# Altium PCB УШЯИ 758724.375.PcbDoc
Units mm, origin at the board's own origin, x right, y up, seen from the top; angles counter-clockwise.
Board outline 78 x 122 mm, 2 copper layers (Top Layer, Bottom Layer), stack 1.5 mm thick; 11 components, 5 nets, 41 pads, 32 vias.
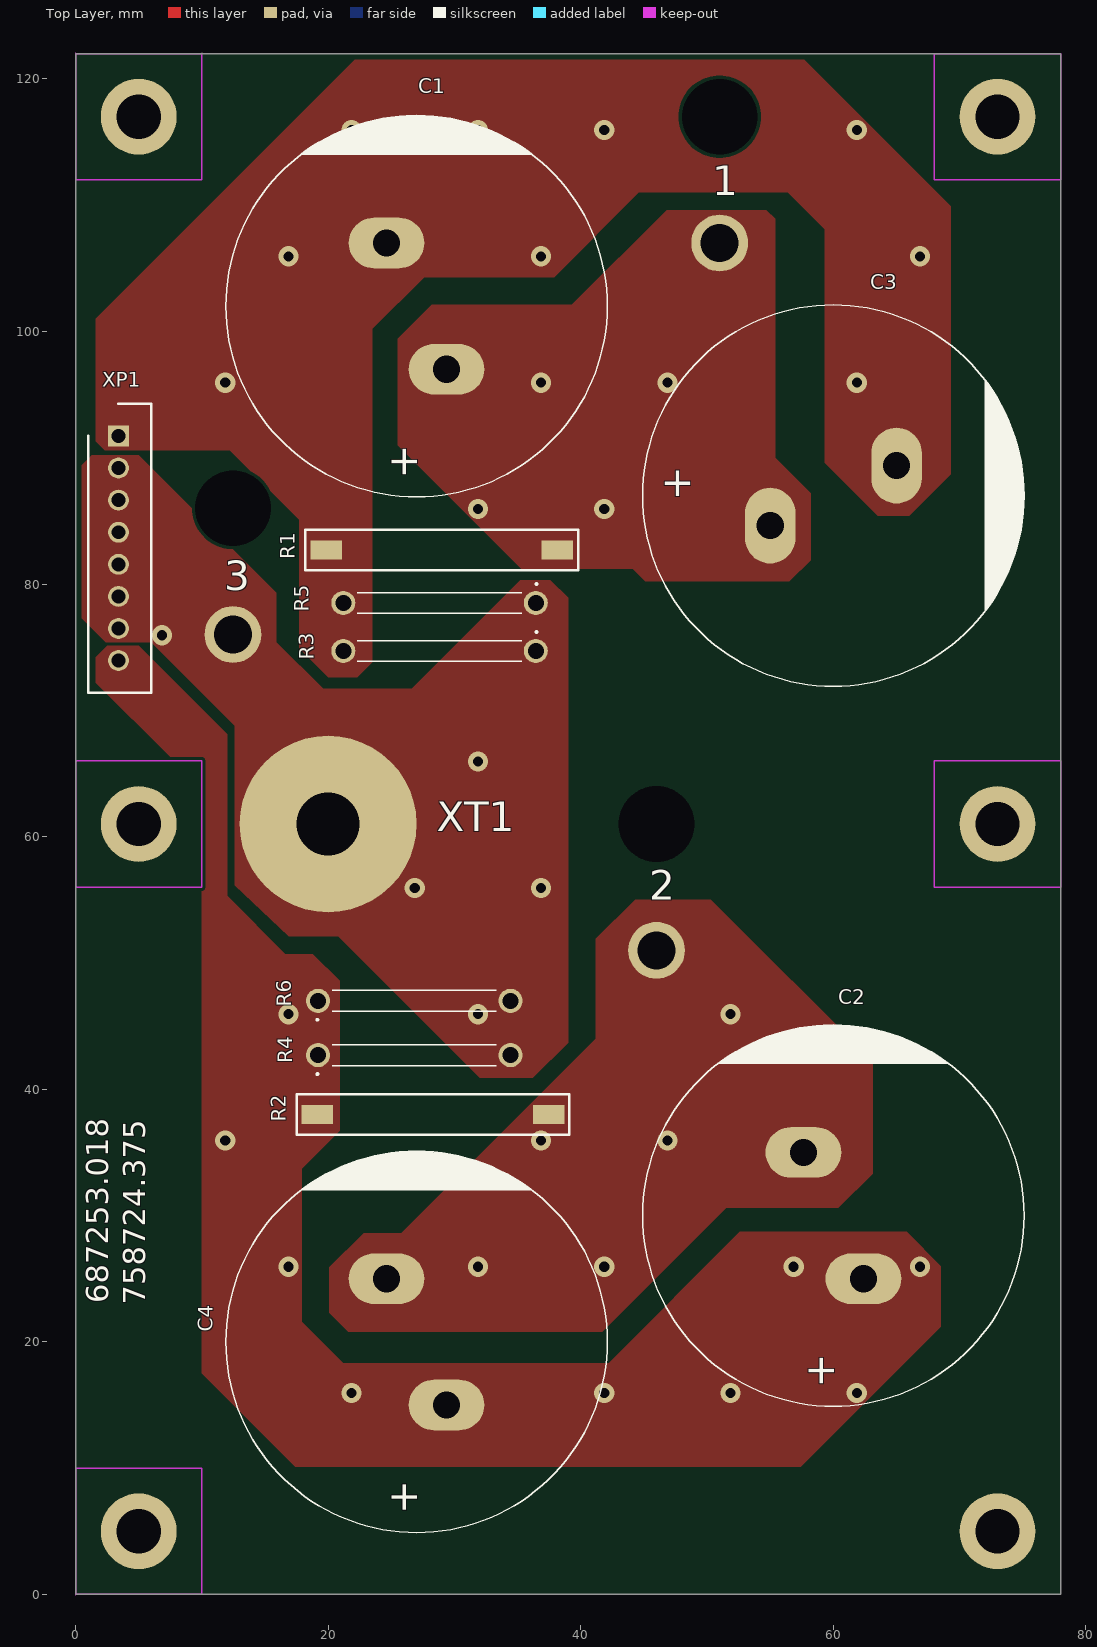
[diagram p0: Top Layer view]
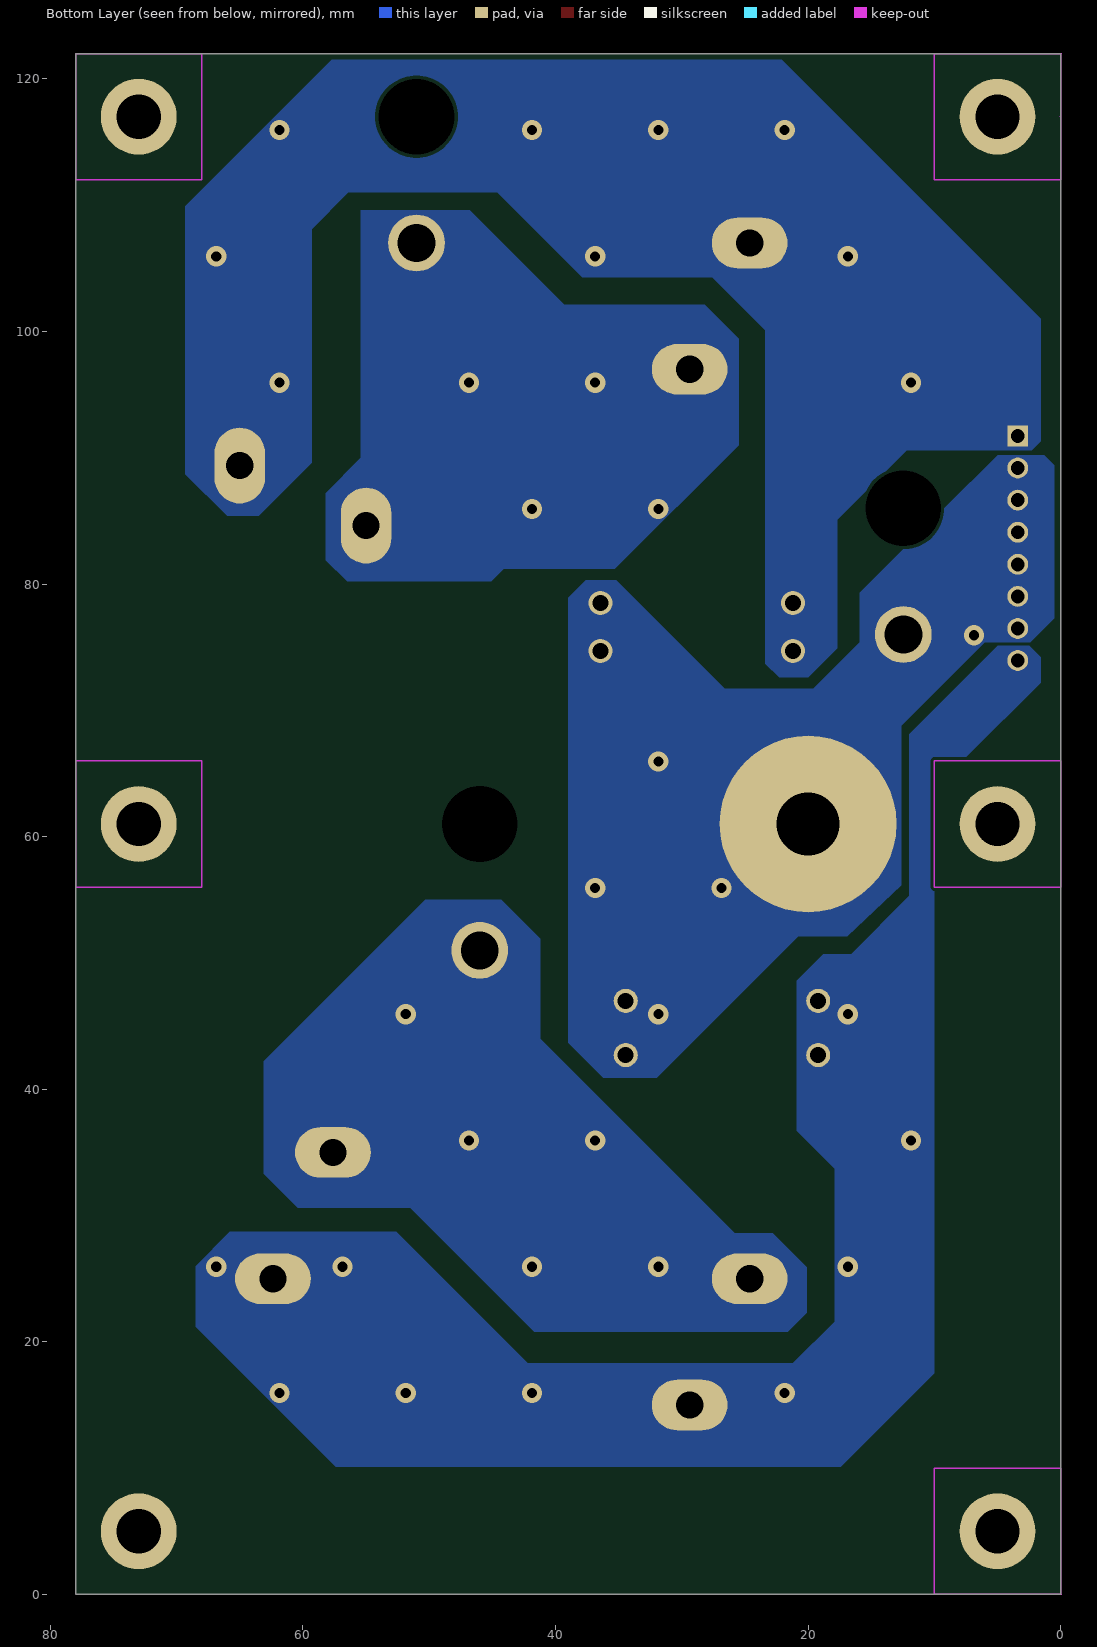
[diagram p1: Bottom Layer view, seen from below]
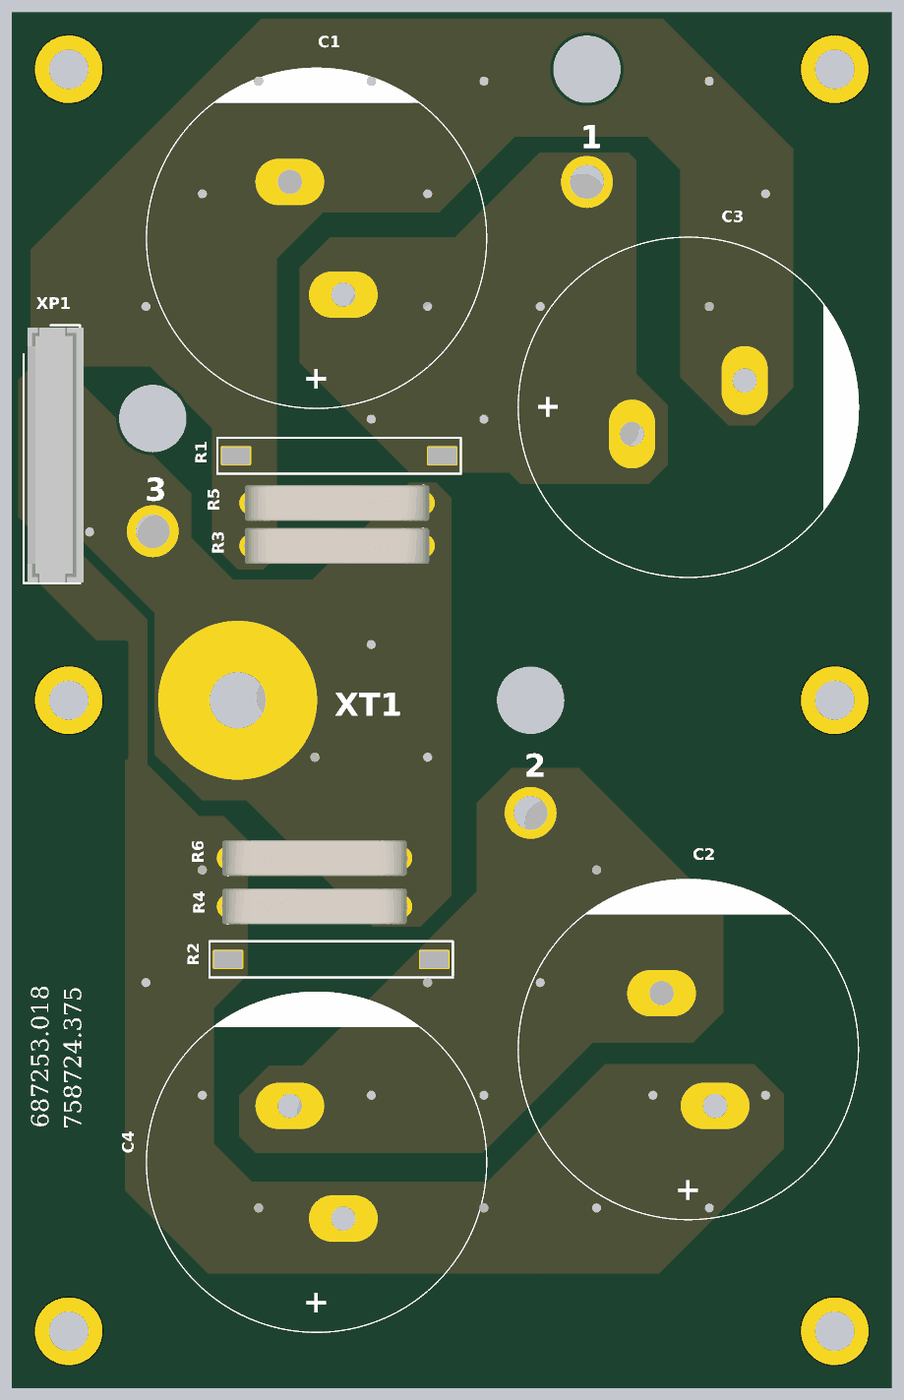
[diagram p2: 3D render of the assembled board from above, using the file's embedded part models]

## Layer stack, top to bottom
Top Solder: solder mask 0.025, Solder Resist, Dk 3.5
Top Layer: signal copper 0.105
Dielectric 1: dielectric 1.29, FR-4, Dk 4.8
Bottom Layer: signal copper 0.105
Bottom Solder: solder mask 0.025, Solder Resist, Dk 3.5

## Board outline
0,0 0,122 78,122 78,0

## Design rules (kind name [scope] priority, off if disabled: settings)
Clearance [All] p1: gap=0.254 ignorepadtopadclearanceinfootprint=FALSE
Height [All] p1: minheight=0 maxheight=100 prefheight=12.7
HoleSize [All] p1: absolutevalues=TRUE maxlimit=20 minlimit=0.025 maxpercent=80.000 minpercent=20.000
MinimumSolderMaskSliver [All] p1: minsoldermaskwidth=0.1
PolygonConnect [All] p1: connectstyle=Direct reliefconductorwidth=0.254 reliefentries=4 polygonreliefangle="90 Angle" airgapwidth=0.254
RoutingVias [All] p1: holewidth=0.3 width=0.6 viastyle="Through Hole" minholewidth=0.3 minwidth=0.6 maxholewidth=1 maxwidth=2
SilkToSilkClearance [All] p1: silktosilkclearance=0.1
SilkToSolderMaskClearance [IsPad] p1: minsilkscreentomaskgap=0.1 clearancetoexposedcopper=TRUE
SolderMaskExpansion [All] p1: expansion=0.102 istentingtop=FALSE
Width [All] p1: maxlimit=0.254 minlimit=0.254 preferedwidth=0.254
25 further rules are at their usual default settings.

## Components (designator, comment, footprint, x,y, rotation, side; value= is the part's Value field where it differs from the comment)
C1 "B43640A2228M000" B43640A2228M000 27,102 r90 top
C2 "B43640A2228M000" B43640A2228M000 60,30 r90 top
C3 "B43640A2228M000" B43640A2228M000 60,87 r0 top
C4 "B43640A2228M000" B43640A2228M000 27,20 r90 top
R1 "С2-33Н-0,5-24 кОм +-5%" "С2-33Н-0,5АИ (070.04.0601.14.00)" 29,82.7 r0 top value="430 Ом"
R2 "С2-33Н-0,5-24 кОм +-5%" "С2-33Н-0,5АИ (070.04.0601.14.00)" 28.3,38 r180 top value="430 Ом"
R3 "OAR3-R005FI" OAR3 36.44,74.7 r180 top value="0.005 Ом"
R4 "OAR3-R005FI" OAR3 19.2,42.7 r0 top value="0.005 Ом"
R5 "OAR3-R005FI" OAR3 36.44,78.5 r180 top value="0.005 Ом"
R6 "OAR3-R005FI" OAR3 19.2,47 r0 top value="0.005 Ом"
XP1 "280373-2" 280373-2 3.4,91.72 r270 top

## Footprints (in the part's own frame and the unit in brackets; to place one, negate y for a bottom-side part, rotate by r counter-clockwise, add the part's x,y. Pads: shape width x height; smd on the part's side, far side on the other; paste and mask are expansions set on the pad)
280373-2 [mm] "AMPMODU 2"
  rect 1.65x1.65 hole 1.1: 1(0,0)
  round 1.65 hole 1.1: 2(2.54,0) 3(5.08,0) 4(7.62,0) 5(10.16,0) 6(12.7,0) 7(15.24,0) 8(17.78,0)
  silkscreen extent -2.56,-2.4 20.34,2.6, body extent -2.35,-2.06 20.25,2.94, height 12.6
B43640A2228M000 [mm]
  oval 4x6 hole 2.15 mask+0.05: 1(-5,-2.375) 2(5,2.375)
  silkscreen extent -15.1,-15.1 15.1,15.1, body extent -15,-15 15,15, height 55
OAR3 [mm]
  round 1.906 hole 1.271: 1(0,0) 2(15.24,0)
  silkscreen extent -0.1,-1.55 14.12,0.82, body extent -0.57,-1.59 15.81,1.59, height 17.89
"С2-33Н-0,5АИ (070.04.0601.14.00)" [mm] "Резисторы постоянные непроволочные общего применения С2-33Н АИ, производитель \"АО\"НПО\"ЭРКОН\""
  rect 2.5x1.5 smd: 1(-9.15,0) 2(9.15,0)
  silkscreen extent -10.8,-1.6 10.8,1.6, body extent -10.25,-1.6 10.25,1.6, height 3.2

## Part data
C1 C2 C3 C4: "Capacitor Polarised, 2200uF, 30x55"
R1 R2: "Резисторы постоянные непроволочные общего применения С2-33Н АИ, производитель \"АО\"НПО\"ЭРКОН\"", Диапазон значений номинальных сопротивлений="от 1 Ом до 5,11 МОм", Категории качества=«ОТК», Номинальная мощность рассеяния="0,5 Вт", Ряд сопротивлений="Е24, Е96", ТУ="ОЖО.467.173 ТУ"
XP1: "Connector"
R3 R4 R5 R6: ModelPrint=0402

## Free pads (board coordinates)
  round 6 hole 3.5 unplated: 1(5,5) 1(5,61) 1(5,117) 1(73,61) 1(73,117) 1(73,5)
  round 4.5 hole 3 mask+0.05: 1(51,107) 2(46,51) 3(12.463,76.003)
  round 14 hole 5 mask+0.05: 4(20,61)
  round 0 hole 6 unplated mask+0.05: TH5(12.463,86.003) TH5(46,61) TH5(51,117)

## Via types
v1: diameter 1.6, hole 0.8, Top Layer to Bottom Layer, tented both sides, 32 vias

## Nets (pads, with @x,y where several pads share a name; then routed paths per layer and width w, separated by ;. In a path a pad name is that pad's centre, name@x,y a point inside that pad or via, vN(x,y) a via of type N, cw(c..) or ccw(c..) an arc to the next point about the centre after c; other vN are vias at no path point)
Net1: C1.1 C3.1 pad.1@51,107 R1.2
  other v1: 31.857,85.943 41.857,85.943 36.857,95.943 46.857,95.943
Net2: C2.2 C4.2 pad.2 R2.1
  other v1: 31.857,25.943 41.857,25.943 36.857,35.943 46.857,35.943 51.857,45.943
Net3: pad.3 pad.4 R3.1 R4.2 R5.1 R6.2 XP1.2 XP1.3 XP1.4 XP1.5 XP1.6 XP1.7
  other v1: 31.857,45.943 26.857,55.943 36.857,55.943 31.857,65.943 6.857,75.943
NetC1_2: C1.2 C3.2 R1.1 R3.2 R5.2 XP1.1
  other v1: 11.857,95.943 61.857,95.943 16.857,105.943 36.857,105.943 66.857,105.943 21.857,115.943 31.857,115.943 41.857,115.943 61.857,115.943
NetC2_1: C2.1 C4.1 R2.2 R4.1 R6.1 XP1.8
  other v1: 21.857,15.943 41.857,15.943 51.857,15.943 61.857,15.943 16.857,25.943 56.857,25.943 66.857,25.943 11.857,35.943 16.857,45.943

## Polygon pours and split planes (outlines as drawn)
NetC2_1 on Top Layer "NONET_L01_P-001" (solid, pour order 8): 65.8,28.7 68.5,26 68.5,21.2 57.4,10.1 17.4,10.1 10,17.5 10,66.3 7.5,66.3 1.6,72.2 1.6,74.2 2.5,75.1 5,75.1 12,68.1 12,55.3 16.6,50.7 18.8,50.7 20.9,48.6 20.9,36.7 17.9,33.7 17.9,21.6 21.2,18.3 42.2,18.3 52.6,28.7
NetC1_2 on Top Layer "NONET_L01_P-001" (solid, pour order 7): 20,72.6 17.7,74.9 17.7,85.1 12.2,90.6 2.3,90.6 1.6,91.3 1.6,101 22.1,121.5 57.7,121.5 69.3,109.9 69.3,88.7 66,85.4 63.5,85.4 59.3,89.6 59.3,108.1 56.4,111 44.6,111 37.9,104.3 27.6,104.3 23.5,100.2 23.5,73.8 22.3,72.6
Net3 on Top Layer "NONET_L01_P-001" (solid, pour order 10): 16.9,52.1 20.8,52.1 31.995,40.9 36.2,40.9 39,43.7 39,78.9 37.6,80.3 35.2,80.3 26.6,71.7 19.6,71.7 15.9,75.4 15.9,79.3 5,90.2 1.3,90.2 0.5,89.4 0.5,77.3 2.4,75.4 6,75.4 12.616,68.784 12.616,56.17
Net2 on Top Layer "NONET_L01_P-001" (solid, pour order 9): 20.1,22.3 21.6,20.8 41.7,20.8 51.5,30.6 60.4,30.6 63.1,33.3 63.1,42.2 50.3,55 44.3,55 41.2,51.9 41.2,44 25.8,28.6 24.4,28.6 22.8,28.6 20.1,25.9 20.1,25.1
Net1 on Top Layer "NONET_L01_P-001" (solid, pour order 6): 54.7,109.6 46.8,109.6 39.3,102.1 28.2,102.1 25.5,99.4 25.5,91 35.3,81.2 44.1,81.2 45.1,80.2 56.5,80.2 58.2,81.9 58.2,87.2 55.4,90 55.4,101.4 55.4,108.9
Net1 on Bottom Layer "NONET_L01_P-001" (solid, pour order 11): 55.4,109.6 46.8,109.6 39.3,102.1 28.2,102.1 25.5,99.4 25.5,91 35.3,81.2 44.1,81.2 45.1,80.2 56.5,80.2 58.2,81.9 58.2,87.2 55.4,90 55.4,101.4
NetC1_2 on Bottom Layer "NONET_L01_P-001" (solid, pour order 12): 20,72.6 17.7,74.9 17.7,85.1 12.2,90.6 2.3,90.6 1.6,91.3 1.6,101 22.1,121.5 57.7,121.5 69.3,109.9 69.3,88.7 66,85.4 63.5,85.4 59.3,89.6 59.3,108.1 56.4,111 44.6,111 37.9,104.3 27.6,104.3 23.4,100.1 23.4,73.7 22.3,72.6
NetC2_1 on Bottom Layer "NONET_L01_P-001" (solid, pour order 2): 65.8,28.7 68.5,26 68.5,21.2 57.4,10.1 17.4,10.1 10,17.5 10,66.3 7.5,66.3 1.6,72.2 1.6,74.2 2.5,75.1 5,75.1 12,68.1 12,55.3 16.6,50.7 18.8,50.7 20.9,48.6 20.9,36.7 17.9,33.7 17.9,21.6 21.2,18.3 42.2,18.3 52.6,28.7
Net2 on Bottom Layer "NONET_L01_P-001" (solid, pour order 3): 20.1,22.3 21.6,20.8 41.7,20.8 51.5,30.6 60.4,30.6 63.1,33.3 63.1,42.2 50.3,55 44.3,55 41.2,51.9 41.2,44 25.8,28.6 24.4,28.6 22.8,28.6 20.1,25.9 20.1,25.1
Net3 on Bottom Layer "NONET_L01_P-001" (solid, pour order 5): 16.9,52.1 20.8,52.1 31.995,40.9 36.2,40.9 39,43.7 39,78.9 37.6,80.3 35.2,80.3 26.6,71.7 19.6,71.7 15.9,75.4 15.9,79.3 5,90.2 1.3,90.2 0.5,89.4 0.5,77.3 2.4,75.4 6,75.4 12.616,68.784 12.616,56.17

## Keep-outs
Keep-Out Layer:
  circle w0.05: c0,122 r0.025
  circle w0.05: c0,122 r0.025
  circle w0.05: c10,122 r0.025
  circle w0.05: c0,117 r0.025
  circle w0.05: c0,0 r0.025
  circle w0.05: c0,0 r0.025
  circle w0.05: c0,0 r0.025
  circle w0.05: c0,0 r0.025
  circle w0.05: c0,0 r0.025
  circle w0.05: c0,0 r0.025
  lines w0.1: 0,0 10,0 10,10 0,10 0,0 ; 0,56 10,56 10,66 0,66 0,56 ; 0,112 0,122 10,122 10,112 0,112 ; 68,56 78,56 78,66 68,66 68,56 ; 68,112 68,122 78,122 78,112 68,112

## Silkscreen, mask and mechanical layers (free items; w line width, h text height)
Top Overlay:
  text "1" at 50.394,110 h4
  text "3" at 11.755,78.711 h4
  text "XT1" at 28.59,59.625 h4
  text "2" at 45.423,54.212 h4
  text "687253.018" at 3.2,23.05 h3 r90
  text "758724.375" at 6.1,22.925 h3 r90
Bottom Paste:
  lines w2.5: 45.2,112.2 59.9,112.3
  lines w4: 12.6,19.3 26.8,13.2 ; 12.9,19.5 17.4,47.1 ; 13.1,75.5 17.8,66.3 ; 20.3,75.6 21,106.8 ; 23.7,61.3 36.5,76.9 ; 23.9,56.7 34.6,44.1 ; 25,107.1 45.6,113.4 ; 27.3,24.4 48.5,48.5 ; 31.9,95.7 50.6,105.7 53.6,85.2 ; 32.6,12.7 62.5,21.8 ; 47.5,50.1 57.3,36 ; 61,112.7 64.1,92.5
Bottom Solder:
  lines w2.5: 45.2,112.2 59.9,112.3
  lines w4: 12.6,19.3 26.8,13.2 ; 12.9,19.5 17.4,47.1 ; 13.1,75.5 17.8,66.3 ; 20.3,75.6 21,106.8 ; 23.7,61.3 36.5,76.9 ; 23.9,56.7 34.6,44.1 ; 25,107.1 45.6,113.4 ; 27.3,24.4 48.5,48.5 ; 31.9,95.7 50.6,105.7 53.6,85.2 ; 32.6,12.7 62.5,21.8 ; 47.5,50.1 57.3,36 ; 61,112.7 64.1,92.5
Mechanical 1:
  circle w0.1: c12.463,76.003 r1
  circle w0.05: c78,1.745 r0.025
  circle w0.05: c20,53.789 r0.025
  circle w0.05: c20,53.789 r0.025
  circle w0.05: c73,0 r0.025
  circle w0.1: c20,61 r4
  circle w0.1: c46,51 r1
  circle w0.1: c51,107 r1
  circle w0.1: c46,61 r1.7
  circle w0.1: c5,61 r1.7
  circle w0.1: c73,61 r1.7
  circle w0.1: c5,5 r1.7
  circle w0.1: c73,5 r1.7
  circle w0.1: c5,117 r1.7
  circle w0.1: c51,117 r1.7
  circle w0.1: c73,117 r1.7
  lines w0.1: 12.082,61 28.113,61 ; 20,53.513 20,67.512 ; 39,-3.966 39,126.427 ; 68,0 68,10 78,10 78,0 68,0
  text "1" at 53.945,105.869 h2.5
  text "2" at 49.151,49.825 h2.5
Board:
  the board outline again, w0.1
Mechanical 5:
  circle w0.1: c20,61 r2.335
  circle w0.1: c20,61 r4.5
  circle w0.2: c20,61 r7
  lines w0.2: 13,61 16.5,54.938 23.5,54.938 27,61 23.5,67.062 16.5,67.062 13,61

## Text inside footprints (layer, text, board x,y; h text height)
C1: Top Overlay "+" at 27.844,88.352 h4 r90
C2: Top Overlay "+" at 60.844,16.352 h4 r90
C3: Top Overlay "+" at 46.352,86.156 h4
C4: Top Overlay "+" at 27.844,6.352 h4 r90